# Altium PCB FOC_STM32G431.PcbDoc
Units mil, origin at the board's own origin, x right, y up, seen from the top; angles counter-clockwise.
Board outline 1653.54 x 1181.1 mil, 4 copper layers (Top Layer, GND, Sign, Bottom Layer), stack 23.756 mil thick; 34 components, 35 nets, 156 pads, 415 vias.
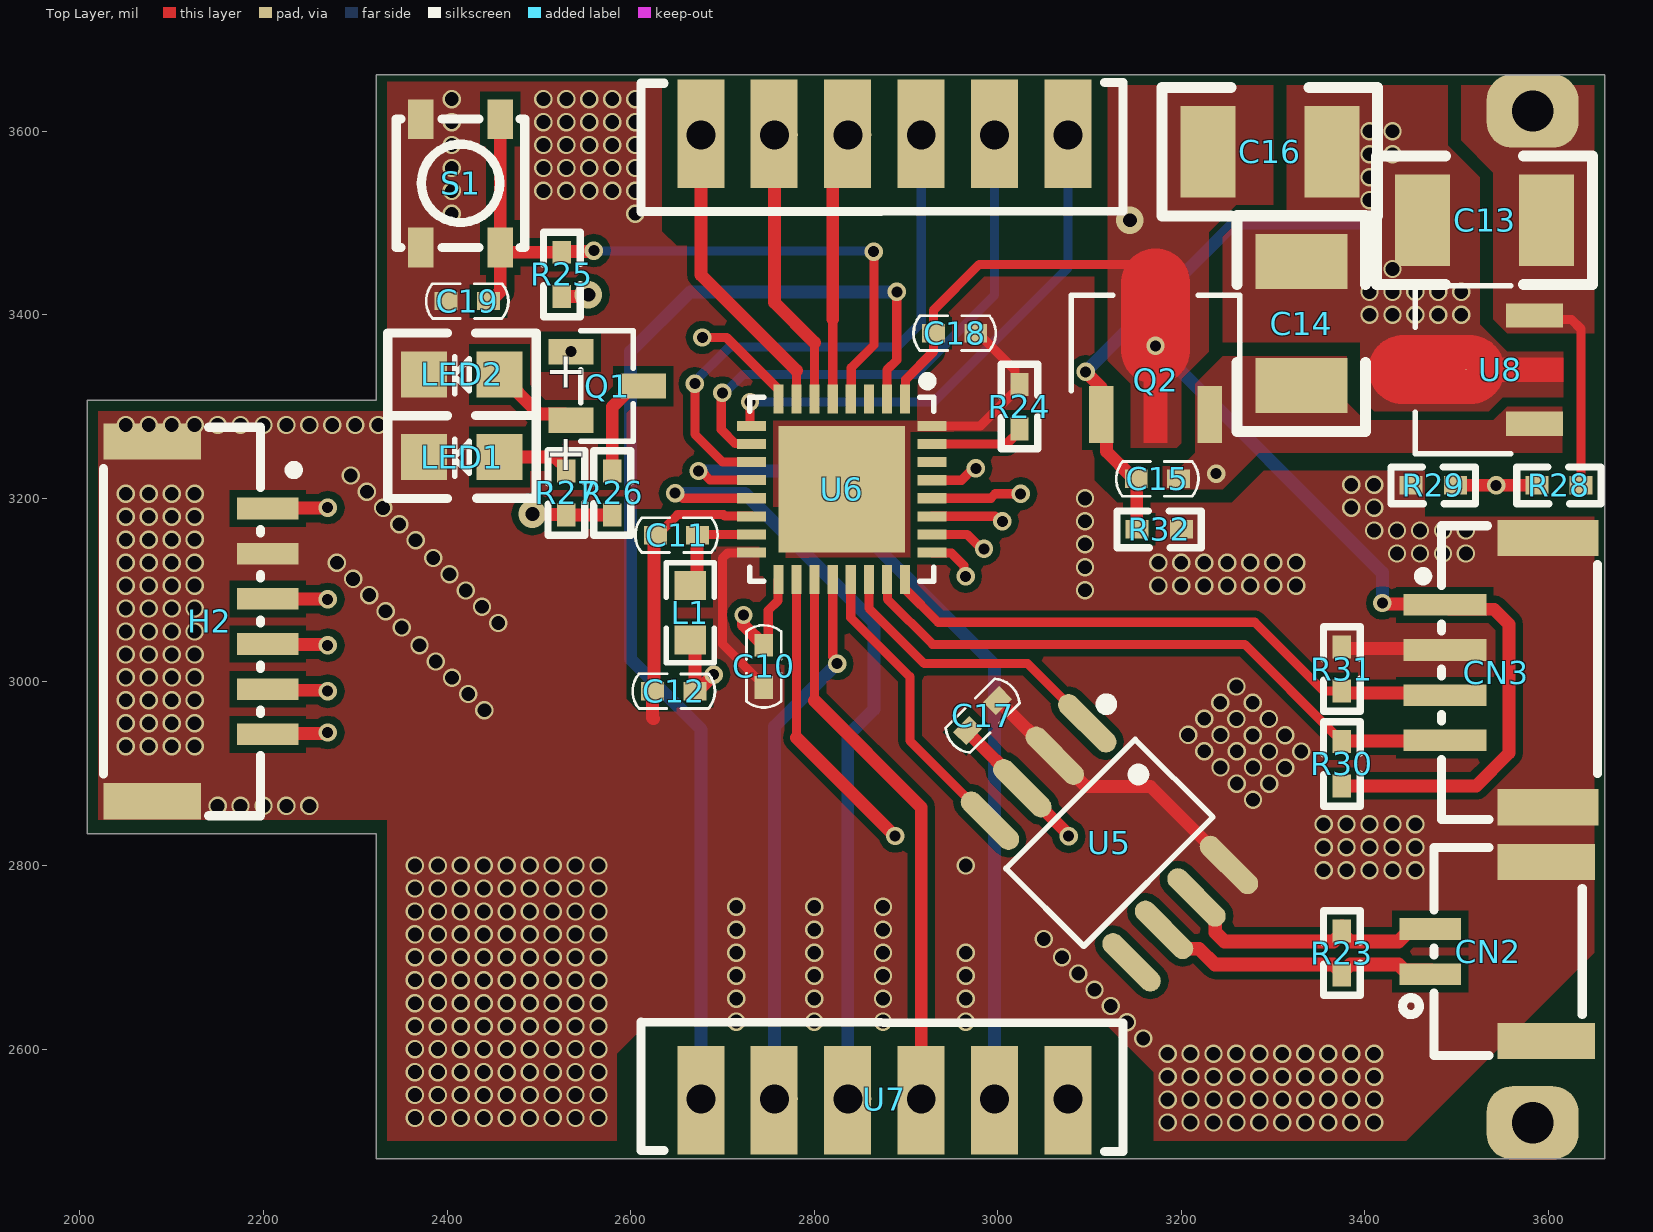
[diagram p0: Top Layer view]
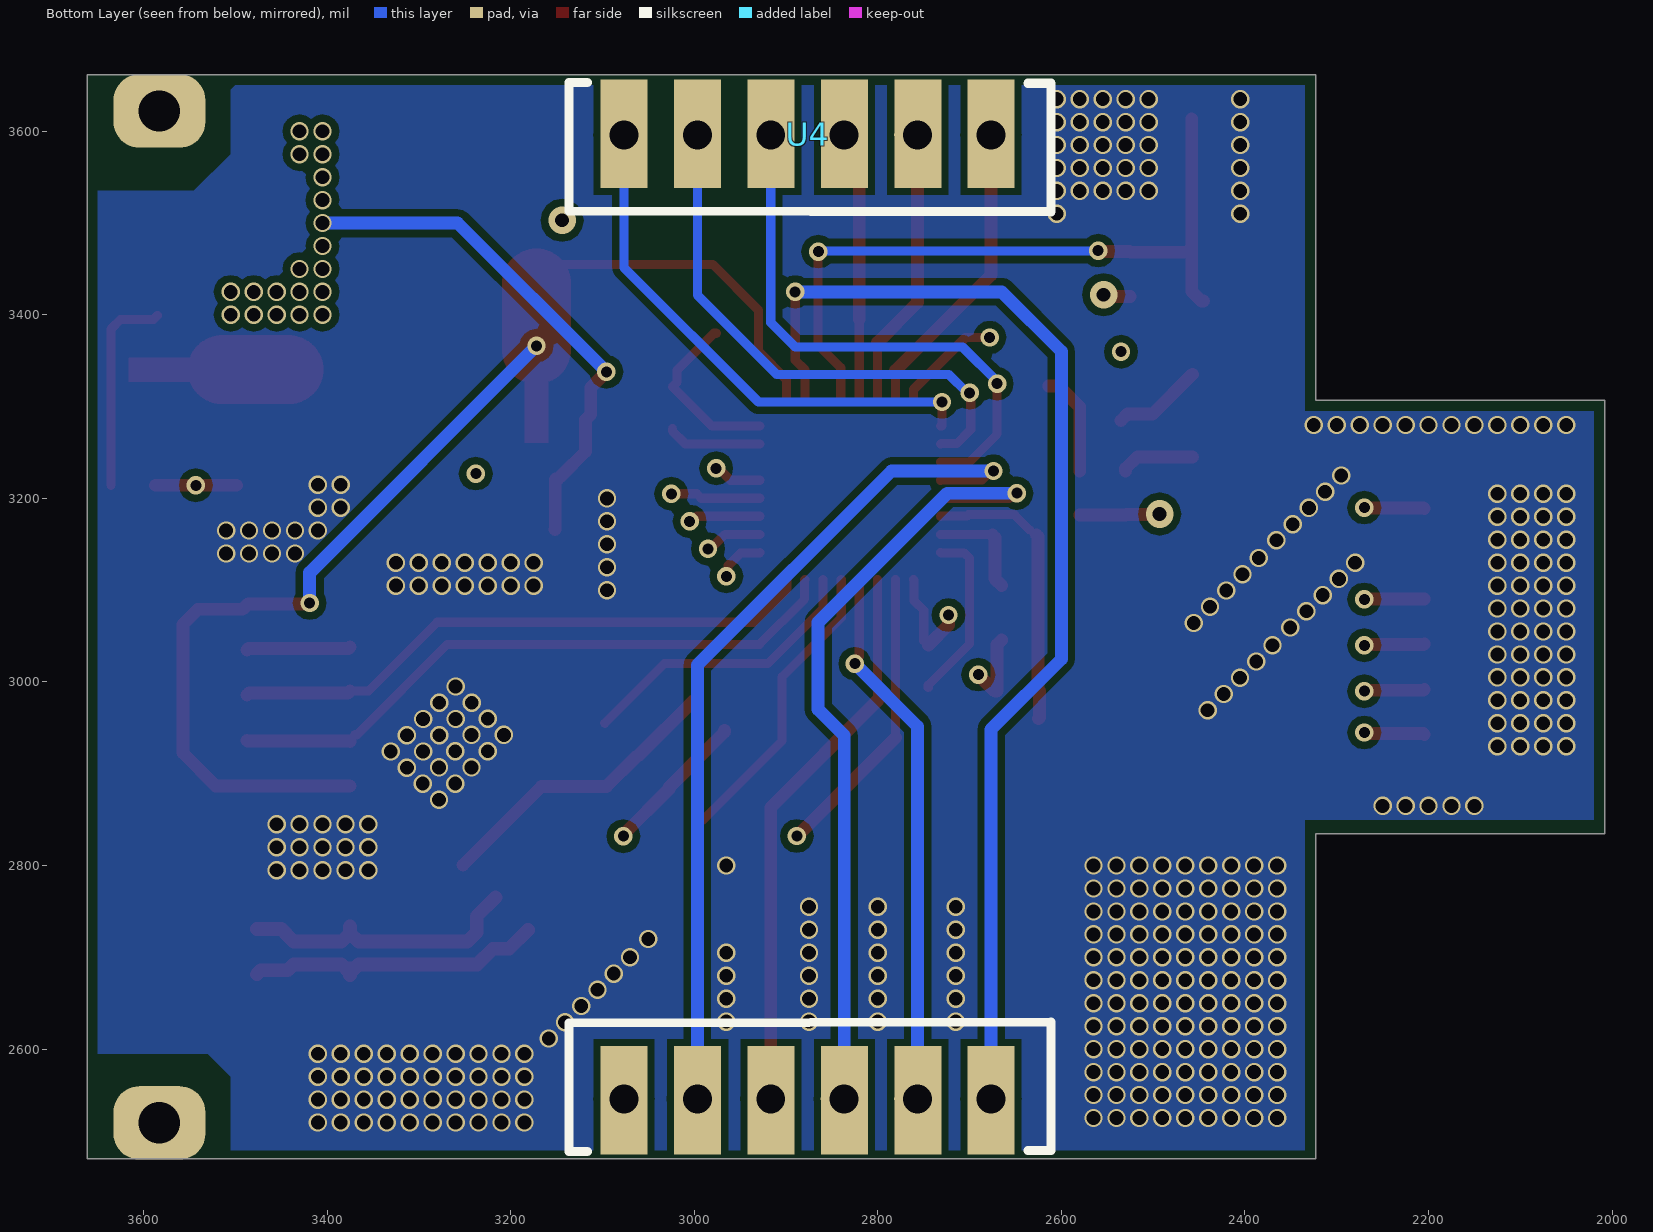
[diagram p1: Bottom Layer view, seen from below]
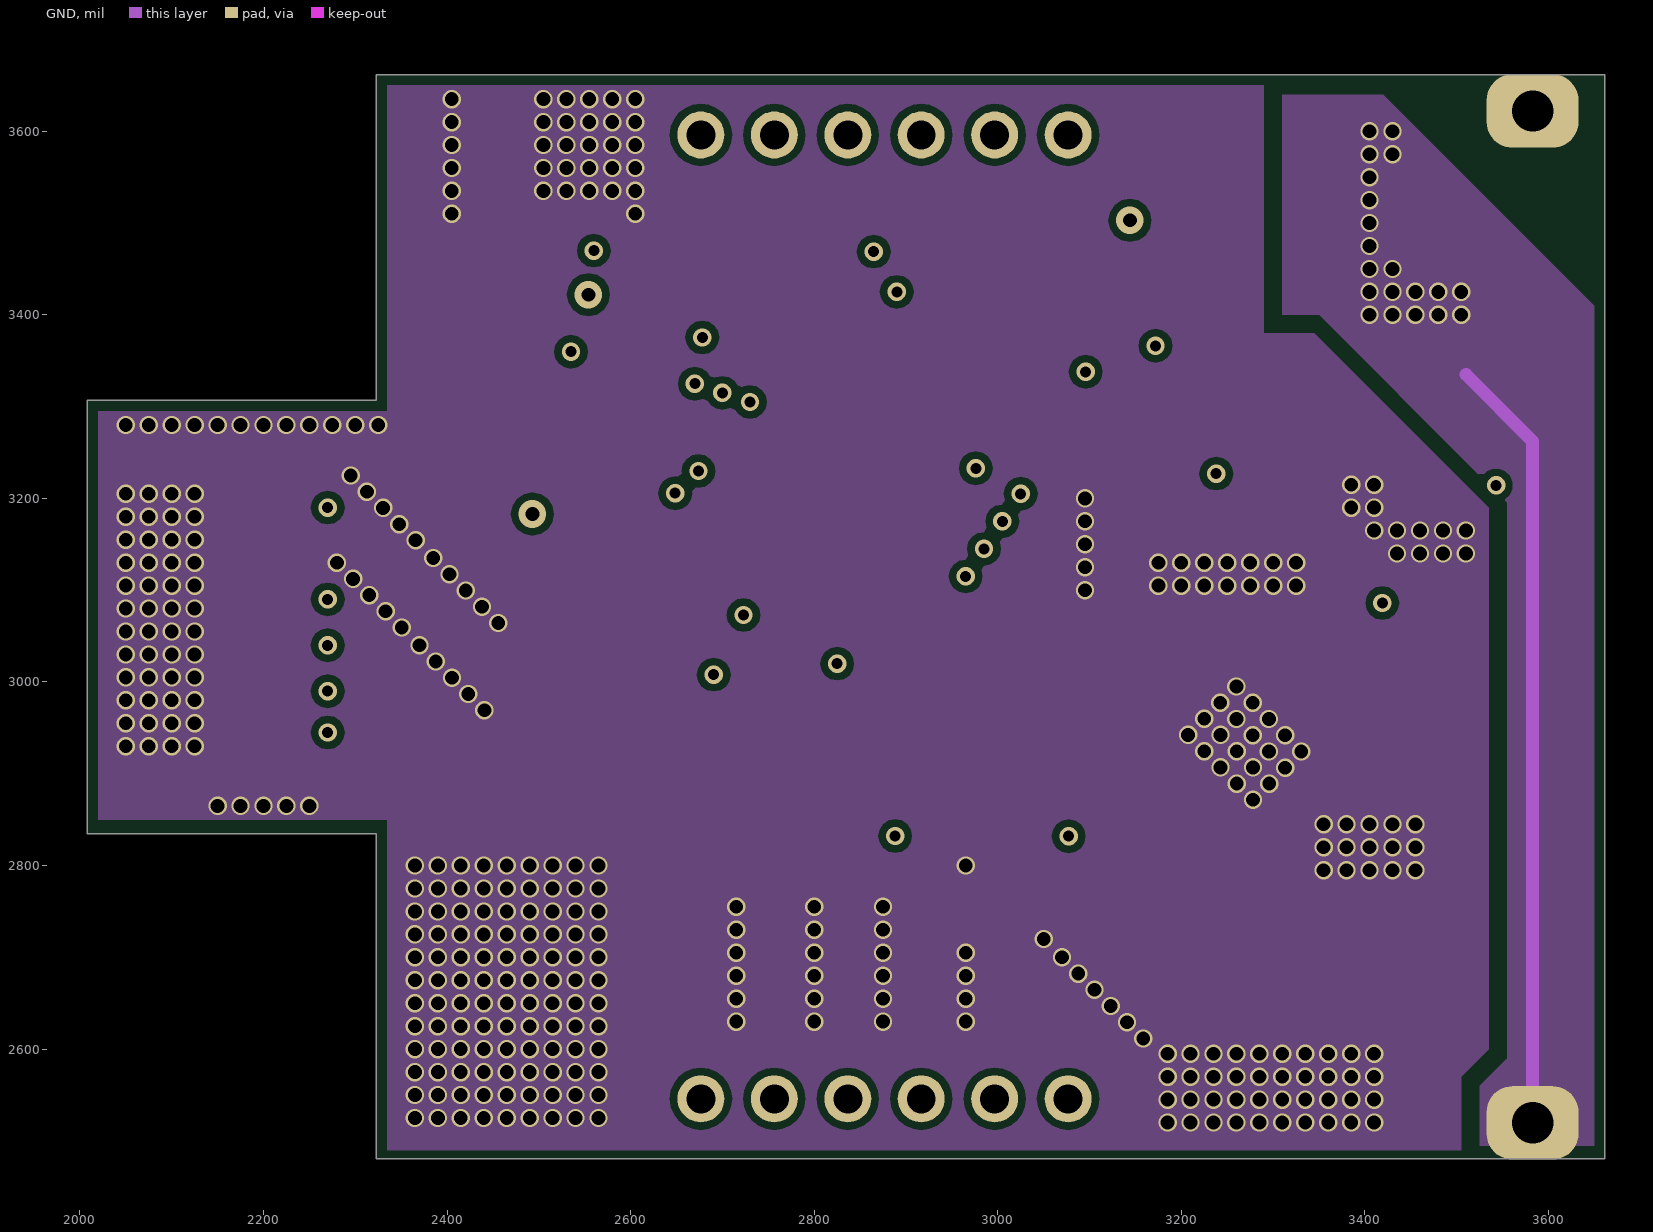
[diagram p2: GND]
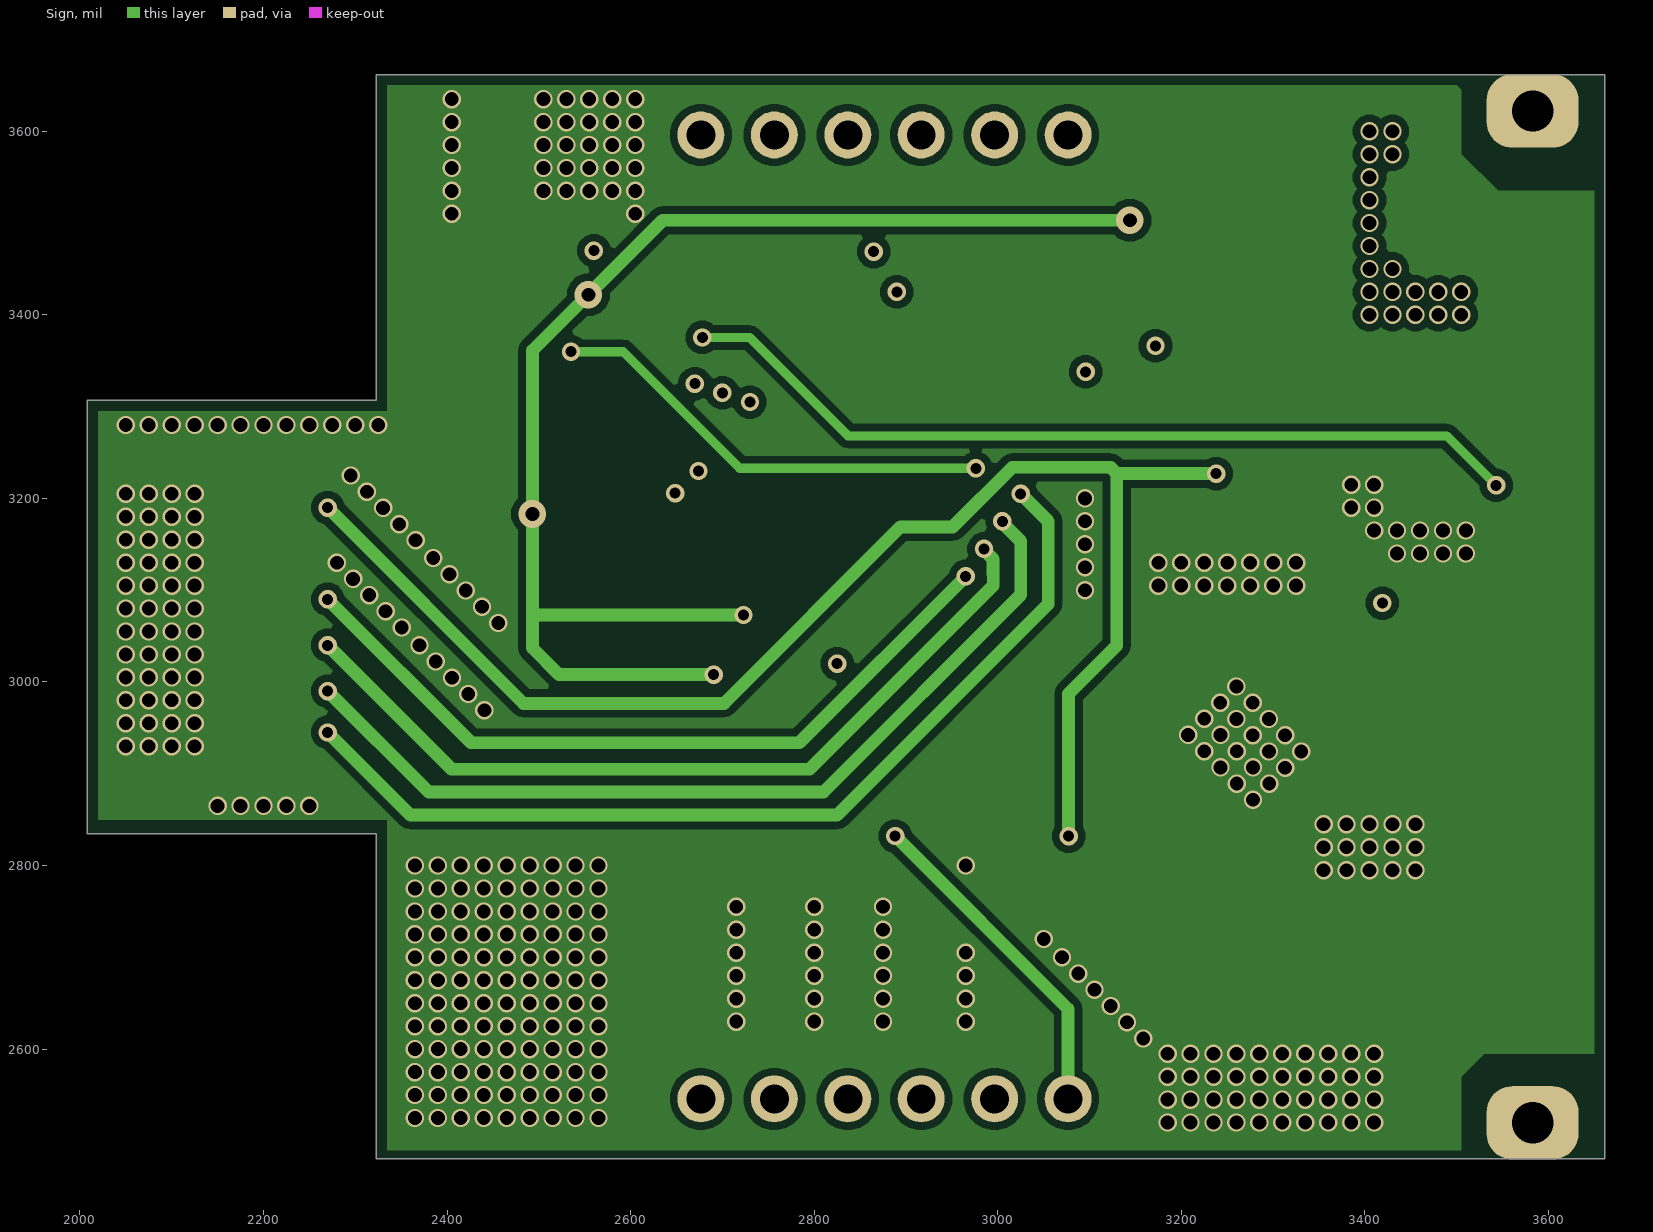
[diagram p3: Sign]
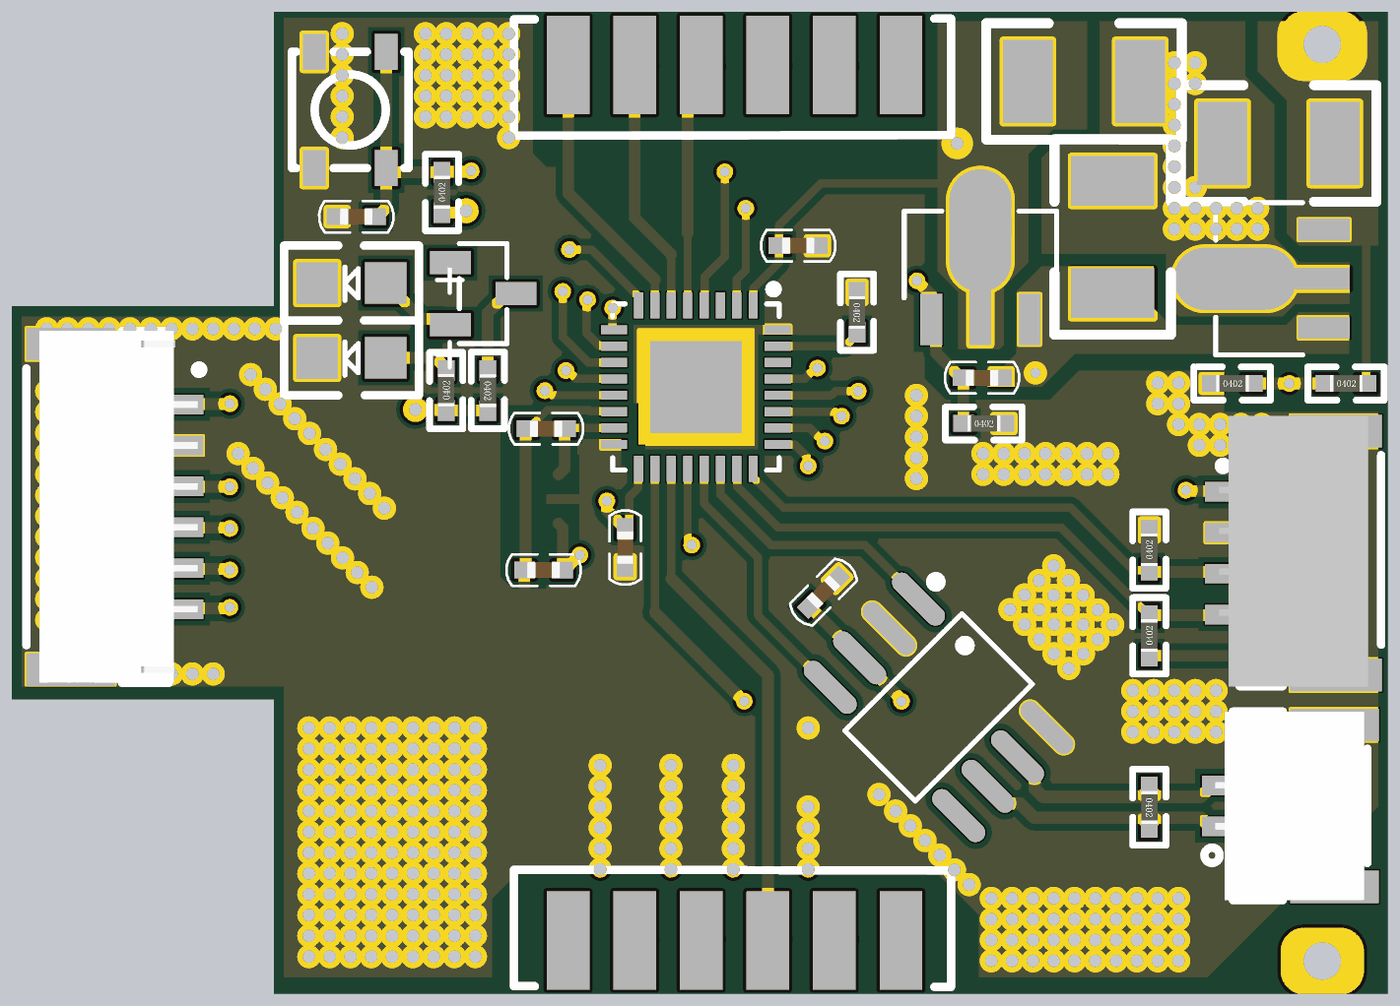
[diagram p4: 3D render of the assembled board from above, using the file's embedded part models]

## Layer stack, top to bottom
Top Solder: solder mask 0.4, Solder Resist, Dk 3.5
Top Layer: signal copper 1.4
Dielectric 2: prepreg 2.8, PP-006, Dk 4.1
GND: signal copper 1.378
Dielectric 1: dielectric 12.6, FR-4, Dk 4.8
Sign: signal copper 1.378
Dielectric 3: prepreg 2.8, PP-006, Dk 4.1
Bottom Layer: signal copper 1.4
Bottom Solder: solder mask 0.4, Solder Resist, Dk 3.5

## Board outline
2007.87,2834.65 2007.87,3307.09 2322.83,3307.09 2322.83,3661.42 3661.42,3661.42 3661.42,2480.32 2322.83,2480.32 2322.83,2834.65

## Design rules (kind name [scope] priority, off if disabled: settings)
Clearance [All] p1: gap=6 ignorepadtopadclearanceinfootprint=FALSE except(0: Arc-Hole Track-Hole SMDPad-Hole THPad-Hole Via-Hole Fill-Hole Poly-Hole Region-Hole Text-Hole; 8: Arc-Fill Arc-Poly Arc-Region Track-Fill Track-Poly Track-Region SMDPad-Fill SMDPad-Poly SMDPad-Region THPad-Fill THPad-Poly THPad-Region Via-Fill Via-Poly Via-Region Fill-Fill Fill-Poly Fill-Region Poly-Poly Poly-Region Region-Region)
DiffPairsRouting [All] p1: maxlimit=10 minlimit=10 mostfreqgap=10 toplayer_minwidth=15 toplayer_maxwidth=15 toplayer_prefwidth=15 midlayer1_minwidth=15 midlayer1_maxwidth=15 midlayer1_prefwidth=15 midlayer2_minwidth=15 midlayer2_maxwidth=15 midlayer2_prefwidth=15 bottomlayer_minwidth=15 bottomlayer_maxwidth=15 bottomlayer_prefwidth=15 maxuncoupledlength=500
HoleToHoleClearance [All] p1: gap=4 allowstackedmicrovias=TRUE
MinimumSolderMaskSliver [All] p1: minsoldermaskwidth=0
PlaneClearance [All] p1: clearance=8
PlaneConnect [All] p1: planeconnectstyle=Direct reliefexpansion=20 reliefentries=4 reliefconductorwidth=10 reliefairgap=10
PolygonConnect [All] p1: connectstyle=Direct reliefconductorwidth=10 reliefentries=4 polygonreliefangle="90 Angle" airgapwidth=10
RoutingVias [All] p1: holewidth=12 width=20 viastyle="Through Hole" minholewidth=10 minwidth=18 maxholewidth=28 maxwidth=50
SilkToSilkClearance [All] p1: silktosilkclearance=0
SilkToSolderMaskClearance [IsPad] p1: minsilkscreentomaskgap=0 clearancetoexposedcopper=TRUE
SolderMaskExpansion [All] p1: expansion=4 istentingtop=FALSE
Width [All] p1: maxlimit=14 minlimit=6 preferedwidth=10
23 further rules are at their usual default settings.

## Classes and differential pairs
differential pair CAN: +CAN_P -CAN_N

## Components (designator, comment, footprint, x,y, rotation, side; value= is the part's Value field where it differs from the comment)
C10 "100nF" c0402 2745,2995 r90 top
C11 "100nF" c0402 2628,3160 r0 top
C12 "100nF" c0402 2625,2990 r0 top
C13 "10uF" 1210 3462.79,3503.03 r0 top
C14 "10uF" 1210 3330.86,3457.95 r270 top
C15 "1uF" c0402 3151.84,3221.26 r0 top
C16 "10uF" 1210 3363.93,3577.59 r180 top
C17 "100nF" c0402 2998.97,2978.89 r225 top
C18 "100nF" c0402 2975,3380 r180 top
C19 "100nF" c0402 2400,3415 r0 top
CN2 "卧式CAN" "GH1.25 2P 卧式" 3534.44,2706.31 r90 top
CN3 "卧式STLINK" CONN-SMD_4P-P1.25_GH1.25-4P 3543.21,3010.24 r90 top
H2 "卧式GH1.25 6PIN" CONN-SMD_6P-P1.25_XYECONN_XY-GH1.25-6A61 2141.73,3065.95 r270 top
L1 "1008屏蔽电感" R0603 2706.01,1710.81 r90 top
LED1 "LED" led0805 2457.3,3245.2 r180 top
LED2 "LED" led0805 2457.3,3335.2 r180 top
Q1 "SS8050" SOT-23-3_L2.9-W1.3-P1.90-LS2.4-BR 2793.35,3167.49 r180 top
Q2 "AMS1117-3.3V_C5120796" SOT-89-3_L4.5-W2.5-P1.50-LS4.2-BR 3171.84,3366.26 r270 top
R23 "120Ω" R0402 3374.9,2728.77 r270 top
R24 "10K" R0402 3023.61,3324.05 r270 top
R25 "10K" R0402 2525,3420 r90 top
R26 "2KΩ" R0402 2580,3230 r270 top
R27 "2K" R0402 2530,3181.8 r90 top
R28 "10K" R0402 3587.23,3214.29 r0 top
R29 "1K" R0402 3450.43,3214.29 r0 top
R30 "10KΩ" R0402 3374.9,2886.8 r90 top
R31 "10KΩ" R0402 3374.9,2990 r90 top
R32 "0" R0402 3151.84,3166.26 r0 top
S1 "SW" KEY_SMD 2414.68,3543.31 r270 top
U4 "邮票孔6P加大" "PCBComponent_1 - duplicate" 2874.02,3582.68 r90 bottom locked
U5 "SN65HVD1050DR" SOIC-8_L4.9-W3.9-P1.27-LS6.0-BL 3121.64,2824.77 r225 top
U6 "STM32G431KBU3" UFQFPN-32_L5.0-W5.0-P0.50-BL-EP3.5 2830,3214.27 r180 top
U7 "邮票孔6P加大" "PCBComponent_1 - duplicate" 2874.02,2559.06 r270 top locked
U8 "78L05-MS" SOT-89-3_L4.5-W2.5-P1.50-LS4.2-BR 3509.98,3340.29 r0 top

## Footprints (in the part's own frame and the unit in brackets; to place one, negate y for a bottom-side part, rotate by r counter-clockwise, add the part's x,y. Pads: shape width x height; smd on the part's side, far side on the other; paste and mask are expansions set on the pad)
1210 [mil]
  rect 60x100 smd: 1(0,0) 2(135,0)
  silkscreen extent -50,-70 185,70, body extent 4,-49 130,49, height 30
c0402 [mil]
  rect 25x20 smd: 1(-1,0) 2(45,0)
  silkscreen extent -23,-19 67,19, body extent 2,-10 42,10, height 20
CONN-SMD_4P-P1.25_GH1.25-4P [mm]
  rect 0.6x2.3 smd mask+0.051: 1(1.875,1.425) 2(0.625,1.425) 3(-0.625,1.425) 4(-1.875,1.425)
  rect 1x2.8 smd mask+0.051: 5(-3.725,-1.425) 6(3.725,-1.425)
  silkscreen extent -4.06,-2.8 4.06,2.15, body extent -4.07,-2.4 4.19,2.15, height 4.13
CONN-SMD_6P-P1.25_XYECONN_XY-GH1.25-6A61 [mm]
  rect 0.6x1.7 smd paste+0 mask+0.05: 1(-3.125,1.6) 2(-1.875,1.6) 3(-0.625,1.6) 4(0.625,1.6) 5(1.875,1.6) 6(3.125,1.6)
  rect 1x2.7 smd paste+0 mask+0.05: 7(4.975,-1.6) 8(-4.975,-1.6)
  silkscreen extent -5.38,-2.95 5.38,2.44, body extent -5.38,-2.55 5.39,2.3, height 4.34
"GH1.25 2P 卧式" [mm]
  rect 0.6x1.7 smd mask+0.051: 1(-0.625,1.602) 2(0.625,1.602)
  rect 1x2.7 smd mask+0.051: 3(2.475,-1.602) 4(-2.475,-1.598)
  silkscreen extent -2.88,-2.6 2.88,2.37, body extent -2.88,-2.51 2.88,2.05, height 4.13
KEY_SMD [mm]
  rect 1.1x0.7 smd: 1(-1.775,-1.1) 1(1.775,-1.1) 2(-1.775,1.1) 2(1.775,1.1)
  silkscreen extent -1.78,-1.78 1.78,1.78, body extent -1.75,-1.35 1.75,1.35, height 1.6
led0805 [mil] "1/8W"
  rect 50x50 smd: 1(0,0) 2(82.3,0.2)
  silkscreen extent -40,-45 122,45, body extent 2,-25 80,25, height 20
"PCBComponent_1 - duplicate" [mm]
  round 1.3 hole 0.8 paste+0 mask+0.102: 1(0.337,5.146) 2(0.337,3.114) 3(0.337,1.082) 4(0.337,-0.95) 5(0.337,-2.982) 6(0.337,-5.014)
  rect 3x1.3 smd far side paste+0 mask+0.102: 1(0.37,5.143) 2(0.37,3.103) 3(0.37,1.073) 4(0.37,-0.957) 5(0.37,-2.987) 6(0.37,-5.017)
  rect 3x1.3 smd paste+0 mask+0.102: 1(0.37,5.143) 2(0.37,3.103) 3(0.37,1.073) 4(0.37,-0.957) 5(0.37,-2.987) 6(0.37,-5.017)
  silkscreen extent -1.79,-6.67 1.79,6.67
R0402 [mil] "1/16W"
  rect 25x20 smd: 1(0,0) 2(48.2,0)
  silkscreen extent -22,-20 70,20, body extent 5,-10 44,10, height 14
R0603 [mil]
  rect 31.75x34.02 smd paste-3937.01 mask+2: 1(1334.87,41.01) 2(1394.19,41.01)
  silkscreen extent 1310,15 1419,67, body extent 1334,24 1396,56, height 18
SOIC-8_L4.9-W3.9-P1.27-LS6.0-BL [mm]
  oval 0.588x2.045 smd mask+0.051: 1(-1.905,-2.772) 2(-0.635,-2.772) 3(0.635,-2.772) 4(1.905,-2.772) 5(1.905,2.772) 6(0.635,2.772) 7(-0.635,2.772) 8(-1.905,2.772)
  silkscreen extent -2.8,-2.92 2.53,1.52, body extent -2.45,-3 2.45,3, height 1.75
SOT-23-3_L2.9-W1.3-P1.90-LS2.4-BR [mm]
  rect 1.25x0.7 smd: 1(6.562,-4.885) 2(6.562,-2.985) 3(4.562,-3.935)
  silkscreen extent 4.84,-5.46 6.29,-2.41, body extent 4.19,-5.39 6.99,-2.49, height 1.3
SOT-89-3_L4.5-W2.5-P1.50-LS4.2-BR [mil]
  rect 62.01x26.46 smd paste+0 mask+2: 1(74.84,-59.04) 3(74.84,59.07)
  round 1 smd: 2(0,0)
  Top Layer region: -68.45,37.4 4.55,37.4 6.3,37.36 8.05,37.24 9.79,37.03 11.52,36.74 13.24,36.38 14.93,35.93 16.61,35.4 18.25,34.8 19.87,34.12 21.45,33.36 23,32.53 24.5,31.63 25.96,30.66 27.38,29.63 28.74,28.53 30.05,27.36 31.3,26.13 32.5,24.85 33.63,23.51 34.7,22.13 35.71,20.69 36.64,19.2 37.51,17.68 38.3,16.11 39.02,12.99 105.84,12.99 105.84,-12.99 39.02,-12.99 38.3,-16.12 37.51,-17.68 36.64,-19.21 35.71,-20.69 34.7,-22.13 33.63,-23.52 32.5,-24.85 31.3,-26.14 30.05,-27.36 28.74,-28.53 27.38,-29.63 25.96,-30.67 24.5,-31.64 23,-32.54 21.45,-33.37 19.87,-34.12 18.25,-34.8 16.61,-35.41 14.93,-35.93 13.24,-36.38 11.52,-36.75 9.79,-37.03 8.05,-37.24 6.3,-37.36 4.55,-37.4 -68.45,-37.4 -70.2,-37.36 -71.95,-37.24 -73.7,-37.03 -75.43,-36.75 -77.14,-36.38 -78.84,-35.93 -80.51,-35.41 -82.15,-34.8 -83.77,-34.12 -85.35,-33.37 -86.9,-32.54 -88.4,-31.64 -89.86,-30.67 -91.28,-29.63 -92.64,-28.53 -93.95,-27.36 -95.21,-26.14 -96.4,-24.85 -97.54,-23.52 -98.61,-22.13 -99.61,-20.69 -100.55,-19.21 -101.41,-17.68 -102.2,-16.12 -102.92,-14.52 -103.56,-12.88 -104.13,-11.22 -104.62,-9.54 -105.02,-7.83 -105.35,-6.11 -105.6,-4.38 -105.76,-2.63 -105.84,-0.88 -105.84,0.88 -105.76,2.63 -105.6,4.37 -105.35,6.11 -105.02,7.83 -104.62,9.54 -104.13,11.22 -103.56,12.88 -102.92,14.51 -102.2,16.11 -101.41,17.68 -100.55,19.2 -99.61,20.69 -98.61,22.12 -97.54,23.51 -96.4,24.85 -95.21,26.13 -93.95,27.36 -92.64,28.53 -91.28,29.63 -89.86,30.66 -88.4,31.63 -86.9,32.53 -85.35,33.36 -83.77,34.12 -82.15,34.8 -80.51,35.4 -78.84,35.93 -77.14,36.38 -75.43,36.74 -73.7,37.03 -71.95,37.24 -70.2,37.36
  silkscreen extent -55,-92 49,92
UFQFPN-32_L5.0-W5.0-P0.50-BL-EP3.5 [mm]
  rect 0.28x0.8 smd paste-100 mask+0.051: 1(-1.75,-2.392) 2(-1.25,-2.392) 3(-0.75,-2.392) 4(-0.25,-2.392) 5(0.25,-2.392) 6(0.75,-2.392) 7(1.25,-2.392) 8(1.75,-2.392) 17(1.75,2.609) 18(1.25,2.608) 19(0.75,2.609) 20(0.25,2.608) 21(-0.25,2.608) 22(-0.75,2.608) 23(-1.25,2.608) 24(-1.75,2.608)
  rect 0.8x0.28 smd paste-100 mask+0.051: 9(2.5,-1.642) 10(2.5,-1.142) 11(2.5,-0.642) 12(2.5,-0.142) 13(2.5,0.358) 14(2.5,0.858) 15(2.5,1.358) 16(2.5,1.858) 25(-2.5,1.858) 26(-2.5,1.358) 27(-2.5,0.858) 28(-2.5,0.358) 29(-2.5,-0.142) 30(-2.5,-0.642) 31(-2.5,-1.142) 32(-2.5,-1.642)
  rect 3.5x3.5 smd paste-100 mask+0.051: 33(0,0.108)
  silkscreen extent -2.54,-3.01 2.54,2.65

## Part data
C10 C11 C12 C18 C19: library part CC0201JRX7R9BB101
C13 C14 C16: library part 1210贴片电容, "1210贴片电容"
C15 C17: library part 0402贴片电容, "贴片电容0402"
LED1 LED2: library part 0805贴片LED, "0805贴片LED"
Q1: library part 2N2222, "三极管"
R23 R26 R30 R31: library part 0402贴片电阻, "0402贴片电阻"
R24 R25 R27 R28 R29 R32: library part 2.2R, BOM_Manufacturer=UniOhm, BOM_Manufacturer Part=0603WAJ022JT5E, BOM_Supplier=LCSC, BOM_Supplier Part=C25226, nameAlias=Value(Ω), spicePre=R, spiceSymbolName=Res_0603(1/10W)_EU
S1: "开关"
U5: "CAN芯片", JLCPCB Part Class="Extended Part", LCSC Part Name=4.5V~5.5V, Manufacturer=TI(德州仪器), Operating Temperature=-40℃~+125℃, Supply Current=50mA, Add into BOM=yes, Convert to PCB=yes, Datasheet=https://www.ti.com/cn/lit/gpn/sn65hvd1050, Device=SN65HVD1050DR, Manufacturer Part=SN65HVD1050DR, Name=SN65HVD1050DR, Supplier=LCSC, Supplier Footprint=SOIC-8, Supplier Part=C14019, Supply Voltage=4.5V~5.5V, Symbol=SN65HVD1050DR, Type=收发器
CN2: LatestRevisionDate=17-Jul-2002, LatestRevisionNote="Re-released for DXP Platform.", Publisher="Altium Limited"

## Free pads (board coordinates)
  rrect70% 100x80 hole 45: 3(3582.68,2519.68) 3(3582.68,3622.05)

## Via types
v1: diameter 20, hole 15, Top Layer to Bottom Layer, 382 vias
v2: diameter 20, hole 12, Top Layer to Bottom Layer, 30 vias
v3: diameter 30, hole 15, Top Layer to Bottom Layer, 3 vias

## Nets (pads, with @x,y where several pads share a name; then routed paths per layer and width w, separated by ;. In a path a pad name is that pad's centre, name@x,y a point inside that pad or via, vN(x,y) a via of type N, cw(c..) or ccw(c..) an arc to the next point about the centre after c; other vN are vias at no path point)
5V: C14.2 C15.2 C17.2 H2.1 Q2.3 U5.3 U8.1 | length 1808.9
  Top Layer w14: H2.1 2205.24,3189.49 2269.49,3189.49 v2(2270,3190) ; C17.2 2967.15,2945.49 3026.78,2885.86 U5.3 3077.16,2833.89 v2(3077.16,2832.02)
  Sign w14: v2(2270,3190) 2483.37,2976.63 2701.63,2976.63 2894,3169 2951,3169 3016,3234 3122.69,3234 3129.69,3227 ; v2(3077.16,2832.02) 3077.16,2987.16 3129.69,3039.69 3129.69,3227 ; v2(3238,3227) 3129.69,3227
+3.3V: C10.2 C12.2 C16.2 C18.2 CN3.1 L1.1 Q2.2 R25.1 R26.2 R27.1 R30.1 U6.1 U6.17 | length 3039.2
  Top Layer w10: C10.2 2750,3045 2750,3078 2760.6,3088.6 2760.6,3111.06 U6.17 ; U6.1 2899.41,3308.94 2899.41,3329.41 2930,3360 2930,3405 2980,3455 3149.14,3455 3155,3449.14 3155,3440 3160,3435
  Top Layer w14: v3(2493,3183) 2493.6,3182.4 2529.4,3182.4 R27.1 R26.2 ; R25.1 2550.38,3420 2552.38,3422 v3(2554,3422) ; L1.1 2670,3040.68 C12.2 2672.5,2990 v2(2690.5,3008) ; v2(2723,3073) 2723,3062 C10.2 ; v3@3143,3503 v3(3144,3503) ; R30.1 3521.33,2886.8 3557.1,2922.57 3557.1,3062.9 3540.75,3079.25 3491.92,3079.25 CN3.1 3486.14,3085.03 3419.97,3085.03 v2(3419,3086)
  Sign w14: v2(2690.5,3008) 2522,3008 2493,3037 2493,3073 ; v2(2723,3073) 2493,3073 ; v3(3144,3503) 2635,3503 2493,3361 v3(2493,3183) 2493,3073
  Bottom Layer w14: v2(3171.84,3366.26) 3419,3119.09 v2(3419,3086)
CAL__: U4.1 U6.9 | length 579
  Top Layer w10: v2(2730,3305) 2730,3279.42 2730.51,3278.91 U6.9
  Bottom Layer w10: v2(2730,3305) 2930,3305 3076.61,3451.61 U4.1@3076.61,3595.96
CAN_N: CN2.1 R23.2 U5.6 | length 327.7
  Top Layer w15: U5.6 3201.68,2709.38 3219.35,2709.38 3236.56,2692.17 3365.8,2692.17 R23.2@3374.9,2683.07 ; R23.2 R23.2@3374.9,2683.07 ; R23.2@3374.9,2685.57 R23.2@3374.9,2688.07 ; CN2.1@3476.37,2681.7 3472.06,2686.01 3442.78,2686.01 3436.62,2692.17 3384,2692.17 R23.2@3374.9,2683.07
CAN_P: CN2.2 R23.1 U5.7 | length 308.8
  Top Layer w15: U5.7 3237.03,2744.73 3237.03,2727.05 3246.92,2717.17 3365.8,2717.17 R23.1@3374.9,2726.27 ; R23.1 R23.1@3374.9,2726.27 ; R23.1@3374.9,2731.27 R23.1@3374.9,2733.77 ; CN2.2@3476.37,2730.92 3449.72,2730.92 3445.41,2726.61 3445.41,2725.95 3436.62,2717.17 3384,2717.17 R23.1@3374.9,2726.27
DGND: C10.1 C11.1 C12.1 C17.1 C18.1 C19.1 CN2.3 CN2.4 CN3.2 CN3.5 CN3.6 H2.2 H2.7 H2.8 LED1.2 LED2.2 R24.1 R29.1 R31.2 R32.2 S1.1 U5.2 U5.8 U6.14 U6.16 U6.32 U6.33 | length 1132.5
  Top Layer w10: C11.1@2634.5,3165.5 2651.38,3182.38 2701.25,3182.38 2702.64,3180.99 2731.06,3180.99 U6.14 ; U6.16 2731.06,3140.6 2705.86,3140.6 2700,3134.74 2700,3041.5 2745,2996.5 C10.1 ; U6.32 2980.96,3278.9 3023.61,3321.55 3018.61,3326.55 3018.61,3339.89 2978.5,3380 C18.1
  Top Layer w14: 2625,2960 2624,2961 C12.1 2625.5,2991.5 2625.5,3158.5 C11.1 ; C17.1 3000.92,2979.6 3060.89,2919.63 U5.2 3095.76,2886 3166.47,2886 U5.8 ; R31.2 3376.58,3036.52 3485.43,3036.52 CN3.2
  other v1: 3185,2520 3210,2520 3235,2520 3260,2520 3285,2520 3310,2520 3335,2520 3360,2520 3385,2520 3410,2520 2365,2525 2390,2525 2415,2525 2440,2525 2465,2525 2490,2525 2515,2525 2540,2525 2565,2525 3185,2545 3210,2545 3235,2545 3260,2545 3285,2545 3310,2545 3335,2545 3360,2545 3385,2545 3410,2545 2365,2550 2390,2550 2415,2550 2440,2550 2465,2550 2490,2550 2515,2550 2540,2550 2565,2550 3185,2570 3210,2570 3235,2570 3260,2570 3285,2570 3310,2570 3335,2570 3360,2570 3385,2570 3410,2570 2365,2575 2390,2575 2415,2575 2440,2575 2465,2575 2490,2575 2515,2575 2540,2575 2565,2575 3185,2595 3210,2595 3235,2595 3260,2595 3285,2595 3310,2595 3335,2595 3360,2595 3385,2595 3410,2595 2365,2600 2390,2600 2415,2600 2440,2600 2465,2600 2490,2600 2515,2600 2540,2600 2565,2600 3158.39,2611.61 2365,2625 2390,2625 2415,2625 2440,2625 2465,2625 2490,2625 2515,2625 2540,2625 2565,2625 3140.71,2629.29 2715,2630 2800,2630 2875,2630 2965,2630 3123.03,2646.97 2365,2650 2390,2650 2415,2650 2440,2650 2465,2650 2490,2650 2515,2650 2540,2650 2565,2650 2715,2655 2800,2655 2875,2655 2965,2655 3105.36,2664.64 2365,2675 2390,2675 2415,2675 2440,2675 2465,2675 2490,2675 2515,2675 2540,2675 2565,2675 2715,2680 2800,2680 2875,2680 2965,2680 3087.68,2682.32 2365,2700 2390,2700 2415,2700 2440,2700 2465,2700 2490,2700 2515,2700 2540,2700 2565,2700 3070,2700 2715,2705 2800,2705 2875,2705 2965,2705 3050,2720 2365,2725 2390,2725 2415,2725 2440,2725 2465,2725 2490,2725 2515,2725 2540,2725 2565,2725 2715,2730 2800,2730 2875,2730 2365,2750 2390,2750 2415,2750 2440,2750 2465,2750 2490,2750 2515,2750 2540,2750 2565,2750 2715,2755 2800,2755 2875,2755 2365,2775 2390,2775 2415,2775 2440,2775 2465,2775 2490,2775 2515,2775 2540,2775 2565,2775 3355,2795 3380,2795 3405,2795 3430,2795 3455,2795 2365,2800 2390,2800 2415,2800 2440,2800 2465,2800 2490,2800 2515,2800 2540,2800 2565,2800 2965,2800 3355,2820 3380,2820 3405,2820 3430,2820 3455,2820 3355,2845 3380,2845 3405,2845 3430,2845 3455,2845 2150,2865 2175,2865 2200,2865 2225,2865 2250,2865 3278.03,2871.61 3260.36,2889.29 3295.71,2889.29 3242.68,2906.97 3278.03,2906.97 3313.03,2906.61 3295.36,2924.29 3330.71,2924.29 3225,2924.64 3260.36,2924.64 2050,2930 2075,2930 2100,2930 2125,2930 3207.32,2942.32 3242.68,2942.32 3277.68,2941.97 3313.03,2941.97 2050,2955 2075,2955 2100,2955 2125,2955 3225,2960 3260,2959.64 3295.36,2959.64 2440.71,2969.29 3242.32,2977.32 3277.68,2977.32 2050,2980 2075,2980 2100,2980 2125,2980 2423.03,2986.97 3260,2995 2050,3005 2075,3005 2100,3005 2125,3005 2405.36,3004.64 2387.68,3022.32 2050,3030 2075,3030 2100,3030 2125,3030 2370,3040 2050,3055 2075,3055 2100,3055 2125,3055 2350.71,3059.29 2455.71,3064.29 2333.03,3076.97 2050,3080 2075,3080 2100,3080 2125,3080 2438.03,3081.97 2315.36,3094.64 2420.36,3099.64 3095,3100 2050,3105 2075,3105 2100,3105 2125,3105 3175,3105 3200,3105 3225,3105 3250,3105 3275,3105 3300,3105 3325,3105 2297.68,3112.32 2402.68,3117.32 3095,3125 2050,3130 2075,3130 2100,3130 2125,3130 2280,3130 3175,3130 3200,3130 3225,3130 3250,3130 3275,3130 3300,3130 3325,3130 2385,3135 3435,3140 3460,3140 3485,3140 3510,3140 3095,3150 2365.71,3154.29 2050,3155 2075,3155 2100,3155 2125,3155 3410,3165 3435,3165 3460,3165 3485,3165 3510,3165 2348.03,3171.97 3095,3175 2050,3180 2075,3180 2100,3180 2125,3180 2330.36,3189.64 3385,3190 3410,3190 3095,3200 2050,3205 2075,3205 2100,3205 2125,3205 2312.68,3207.32 3385,3215 3410,3215 2295,3225 2050,3280 2075,3280 2100,3280 2125,3280 2150,3280 2175,3280 2200,3280 2225,3280 2250,3280 2275,3280 2300,3280 2325,3280 2405,3510 2605,3510 2405,3535 2505,3535 2530,3535 2555,3535 2580,3535 2605,3535 2405,3560 2505,3560 2530,3560 2555,3560 2580,3560 2605,3560 2405,3585 2505,3585 2530,3585 2555,3585 2580,3585 2605,3585 2405,3610 2505,3610 2530,3610 2555,3610 2580,3610 2605,3610 2405,3635 2505,3635 2530,3635 2555,3635 2580,3635 2605,3635
ENABLE__: U4.2 U6.10 | length 595.1
  Top Layer w10: v2(2700,3315) 2698.67,3313.67 2698.67,3275 2713.94,3259.73 2731.06,3259.73 U6.10
  Bottom Layer w10: v2(2700,3315) 2702.71,3315 2722.71,3335 2910,3335 2996.61,3421.61 U4.2@2996.61,3595.96
FDCAN_RX: U5.4 U6.21 | length 325.4
  Top Layer w10: U6.21 2839.85,3070.15 2904.24,3005.76 2904.24,2936.1 U5.4
FDCAN_TX: U5.1 U6.22 | length 321
  Top Layer w10: U6.22 2859.53,3080.47 2920,3020 3032.47,3020 U5.1
M0_AH__: U6.18 U7.1 | length 690
  Top Layer w10: 2780.79,2939.21 U6.18
  Top Layer w14: 2780.79,2939.21 2887.83,2832.17 v2(2888.18,2832.17) ; U7.1@3076.5,2544.49 3076.61,2544.6 U7.1@3076.61,2545.77
  Sign w14: v2(2888.18,2832.17) 3076.61,2643.74 U7.1@3076.61,2545.77
  Bottom Layer w14: v2@2888.18,2832 v2(2888.18,2832.17)
M0_AL__: U6.12 U7.2 | length 944.7
  Top Layer w10: v2(2673.94,3229.88) 2676.64,3229.88 2686.6,3219.92 2731.49,3219.92 U6.12
  Bottom Layer w14: v2(2673.94,3229.88) 2785.12,3229.88 2996.61,3018.39 U7.2@2996.61,2545.77
M0_BH__: U6.19 U7.3 | length 613.9
  Top Layer w10: 2800.48,2979.52 U6.19
  Top Layer w14: 2800.48,2979.52 2916.61,2863.39 U7.3@2916.61,2545.77
M0_BL__: U6.13 U7.4 | length 892.4
  Top Layer w10: v2(2648.55,3205.66) 2651.26,3205.66 2656.75,3200.17 U6.13
  Bottom Layer w14: v2(2648.55,3205.66) 2724.34,3205.66 2865,3065 2865,2970 2836.61,2941.61 2836.61,2545.77 2836.61,2544.75 U7.4@2836.35,2544.49
M0_CH__: U6.20 U7.5 | length 596.1
  Top Layer w10: U6.20 2820.16,3027.55 2825,3022.71 v2(2825,3020)
  Bottom Layer w14: U7.5@2756.61,2545.77 2756.61,2951.61 v2(2825,3020)
M0_CL__: U6.2 U7.6 | length 1283.9
  Top Layer w10: U6.2 2879.21,3339.84 2890,3350.63 v2(2890,3425)
  Bottom Layer w14: U7.6@2676.61,2545.77 2676.61,2948.39 2600,3025 2600,3360 2665,3425 v2(2890,3425)
M0_SOA__: U4.4 U6.5 | length 294.3
  Top Layer w10: U6.5 2820.16,3395.16
  Top Layer w14: 2820.16,3395.16 2820.16,3569.46 2836.61,3585.9 U4.4@2836.61,3595.96
M0_SOB__: U4.5 U6.6 | length 305.7
  Top Layer w10: 2800.16,3369.53 2800.47,3369.22 U6.6
  Top Layer w14: U4.5@2756.61,3595.96 2756.61,3413.39 2800.16,3369.84 2800.16,3369.53
M0_SOC__: U4.6 U6.7 | length 330.7
  Top Layer w10: U6.7 2780.79,3339.21
  Top Layer w14: U4.6@2676.61,3595.96 2676.61,3443.39 2780.79,3339.21
NetC11_2: C11.2 L1.2 U6.15 | length 118
  Top Layer w10: C11.2 2673.8,3160.8 U6.15
  Top Layer w14: L1.2 2672.5,3112.5 2672.5,3157.5 C11.2@2675,3160
NetC19_2: C19.2 R25.2 S1.2 U6.4 | length 786.2
  Top Layer w10: U6.4 2840.35,3308.94 2840.35,3342.35 2865,3367 2865,3468.69 v2(2864.81,3468.88)
  Top Layer w14: C19.2 2447.5,3415 2457.99,3425.49 S1.2@2457.99,3473.43 ; S1.2@2457.99,3613.19 S1.2@2457.99,3473.43 ; v2(2560,3470) 2559.1,3469.1 2525.9,3469.1 R25.2 2463.22,3468.2 S1.2@2457.99,3473.43
  Bottom Layer w10: v2(2560,3470) 2560.56,3469.44 2864.25,3469.44 v2(2864.81,3468.88)
NetLED1_1: LED1.1 R27.2 | length 80.5
  Top Layer w14: LED1.1 2517.3,3245.2 2530,3232.5 R27.2
NetLED2_1: LED2.1 Q1.2 | length 98.5
  Top Layer w14: LED2.1 2500.72,3291.78 2528.22,3291.78 Q1.2
NetQ1_3: Q1.3 R26.1 | length 112.7
  Top Layer w14: R26.1 2580,3299.49 2602.91,3322.4 Q1.3
NetR24_2: R24.2 U6.31 | length 103.5
  Top Layer w10: U6.31 3009.47,3259.21 3023.61,3273.35 R24.2
nFAULT__: U4.3 U6.11 | length 642.7
  Top Layer w10: v2(2670,3325) 2670,3270 2700.46,3239.54 U6.11
  Bottom Layer w10: v2(2670,3325) 2670,3327.29 2707.71,3365 2890,3365 2916.61,3391.61 2916.61,3595.96 2910.08,3589.44 U4.3@2910.08,3565.08
PGND: C13.1 C14.1 C15.1 C16.1 pad.3@3582.68,2519.68 Q2.1 R32.1 U8.2 | length 1418.2
  Top Layer w14: v2(3095.71,3337.9) 3112.8,3320.81 Q2.1 3118.45,3285.76 3118.45,3251.14 3145.34,3224.26 3148.34,3221.26 C15.1 3151.34,3220.76 3151.34,3166.76 R32.1
  GND w14: 3510,3335 3582.68,3262.32 pad.3@3582.68,2519.68
  Bottom Layer w14: v2(3095.71,3337.9) 3257.81,3500 v1(3405,3500)
  other v1: 3405,3400 3430,3400 3455,3400 3480,3400 3505,3400 3405,3425 3430,3425 3455,3425 3480,3425 3505,3425 3405,3450 3430,3450 3405,3475 3405,3525 3405,3550 3405,3575 3430,3575 3405,3600 3430,3600
SPI_MISO: H2.5 U6.27 | length 1122.9
  Top Layer w10: U6.27 2996.82,3180.47 3002.29,3175 v2(3005,3175)
  Top Layer w14: H2.5 2205.79,2991.06 2268.94,2991.06 v2(2270,2990)
  Sign w14: v2(2270,2990) 2380,2880 2810,2880 3025,3095 3025,3153.38 3005,3173.38 v2(3005,3175)
SPI_MOSI: H2.6 U6.28 | length 1214.7
  Top Layer w10: U6.28 2992.45,3200.16 2997.29,3205 v2(3025,3205)
  Top Layer w14: H2.6 2205.77,2943.96 2268.96,2943.96 v2(2270,2945)
  Sign w14: v2(2270,2945) 2360,2855 2825,2855 3055,3085 3055,3175 v2(3025,3205)
SPI_NSS: H2.3 U6.25 | length 953.6
  Top Layer w10: U6.25 2928.94,3140.59 2949.41,3140.59 2963.09,3126.91 2963.09,3116.91 v2(2965,3115)
  Top Layer w14: H2.3 2205,3090.28 2269.72,3090.28 v2(2270,3090)
  Sign w14: v2(2270,3090) 2426.26,2933.74 2783.74,2933.74 v2(2965,3115)
SPI_SCK: H2.4 U6.26 | length 1036.8
  Top Layer w10: U6.26 2966.51,3160.79 2982.29,3145 v2(2985,3145)
  Top Layer w14: H2.4 2205.39,3040.67 2269.33,3040.67 v2(2270,3040)
  Sign w14: v2(2270,3040) 2405,2905 2795,2905 2995,3105 2995,3117.53 2994.98,3133.8 2985,3143.78 v2(2985,3145)
State_LED: Q1.1 U6.29 | length 546.8
  Top Layer w10: U6.29 2960.43,3219.84 2973.41,3232.82 v2(2976.11,3232.82)
  Sign w10: v2(2535,3359.8) 2591.87,3359.8 2718.85,3232.82 v2(2976.11,3232.82)
SWCLK: CN3.3 R31.1 U6.24 | length 646.4
  Top Layer w10: U6.24 2898.9,3101.34 2935.24,3065 3280,3065 3355,2990 R31.1
  Top Layer w14: R31.1 3377.09,2987.81 3484.93,2987.81 CN3.3
SWDIO: CN3.4 R30.2 U6.23 | length 685.7
  Top Layer w10: U6.23 2879.73,3111.06 2879.73,3090.27 2929,3041 3268.9,3041 3367.4,2942.5 R30.2@3369.9,2942.5
  Top Layer w14: R30.2 3375.61,2935.71 3486.4,2935.71 CN3.4
VCC__: C13.2 pad.3@3582.68,3622.05 R28.2 U8.3 | length 227
  Top Layer w10: U8.3 3589.13,3395.04 3624.96,3395.04 3635.43,3384.57 R28.2
VCC_ADC: R28.1 R29.2 U6.8 | length 1138.8
  Top Layer w10: v2(2678.06,3375.37) 2704.39,3375.37 2761.1,3318.66 U6.8
  Top Layer w14: R29.2 v2(3542.93,3214.29) R28.1
  Sign w10: v2(2678.06,3375.37) 2729.63,3375.37 2836.9,3268.1 3489.12,3268.1 v2(3542.93,3214.29)
  Bottom Layer w10: v2@2676.73,3374.04 v2(2678.06,3375.37)
pads on no net: U5.5 U6.3 U6.30

## Polygon pours and split planes (outlines as drawn)
DGND on Top Layer (solid, remove dead copper, pour order 17): 2335,2500 2585,2500 2585,2595 2620,2630 3115,2630 3170,2575 3170,2500 3445,2500 3650,2705 3650,3180 3465,3180 3465,3230 3290,3230 3255,3195 3130,3195 3105,3220 3105,3475 2650,3475 2634,3491 2634,3653.59 2634.15,3653.74 2633.89,3654 2335,3654 2335,3295 2020,3295 2020,2850 2335,2850
+3.3V on Top Layer "NONET_L-01_P-001" (solid, pour order 4): 3145,3255 3195,3255 3200,3260 3200,3330 3230,3360 3230,3490 3260,3520 3300,3520 3300,3650 3120,3650 3120,3350 3145,3325
PGND on Top Layer "NONET_L-01_P-001" (solid, pour order 2): 3410,3295 3395,3310 3395,3370 3245,3370 3245,3485 3265,3505 3310,3505 3315,3510 3315,3650 3490,3650 3490,3585 3525,3550 3525,3390 3555,3360 3615.82,3360 3615.82,3310 3550,3310 3535,3295
5V on Top Layer "NONET_L-01_P-001" (solid, pour order 1): 3180,3210 3180,3235 3200,3235 3215,3250 3215,3325 3245,3355 3380,3355 3380,3305 3400,3285 3540,3285 3555,3300 3615,3300 3615,3250 3285,3250 3245,3210
VCC__ on Top Layer "NONET_L-01_P-001" (solid, pour order 0): 3505,3650 3650,3650 3650,3380 3555,3380 3540,3395 3540,3555 3505,3590
DGND on GND (solid, pour order 15): 2335,2490 3505,2490 3505,2570 3535,2600 3535,3190 3345,3380 3290,3380 3290,3650 2335,3650 2335,3295 2020,3295 2020,2850 2335,2850
PGND on GND "NONET_L-01_P-001" (solid, pour order 6): 3525,2495 3650,2495 3650,3410 3420,3640 3310,3640 3310,3545 3310,3400 3350,3400 3555,3195 3555,2590 3525,2560
DGND on Bottom Layer (solid, remove dead copper, pour order 16): 2335,2490 3505,2490 3505,2570 3530,2595 3650,2595 3650,3535 3545,3535 3505,3575 3505,3645 3500,3650 2335,3650 2335,3295 2020,3295 2020,2850 2335,2850
DGND on Sign (solid, remove dead copper, pour order 14): 2335,2490 3505,2490 3505,2570 3530,2595 3650,2595 3650,3535 3545,3535 3505,3575 3505,3645 3500,3650 2335,3650 2335,3295 2020,3295 2020,2850 2335,2850

## Other copper
Top Layer:
  pour cut-out: 2690,3190 2691,3191 2740,3191 2740,3153 2734.55,3147.55 2693.5,3147.55
  pour cut-out: 2598.5,3188.5 2595,3185 2595,2981.5 2609,2967.5 2650,2967.5 2650,3188.5
  pour cut-out: 2740,3191 2769,3191 2769,3119.46 2761.11,3111.57 2757.68,3115 2740,3115

## Silkscreen, mask and mechanical layers (free items; w line width, h text height)
Mechanical 1:
  the board outline again, w10

## Text inside footprints (layer, text, board x,y; h text height)
LED1: Top Overlay "+" at 2506.3,3264.2 h40 r180
LED2: Top Overlay "+" at 2506.3,3354.2 h40 r180